# EAGLE board xBeeMSP (EAGLE 9.2.2)
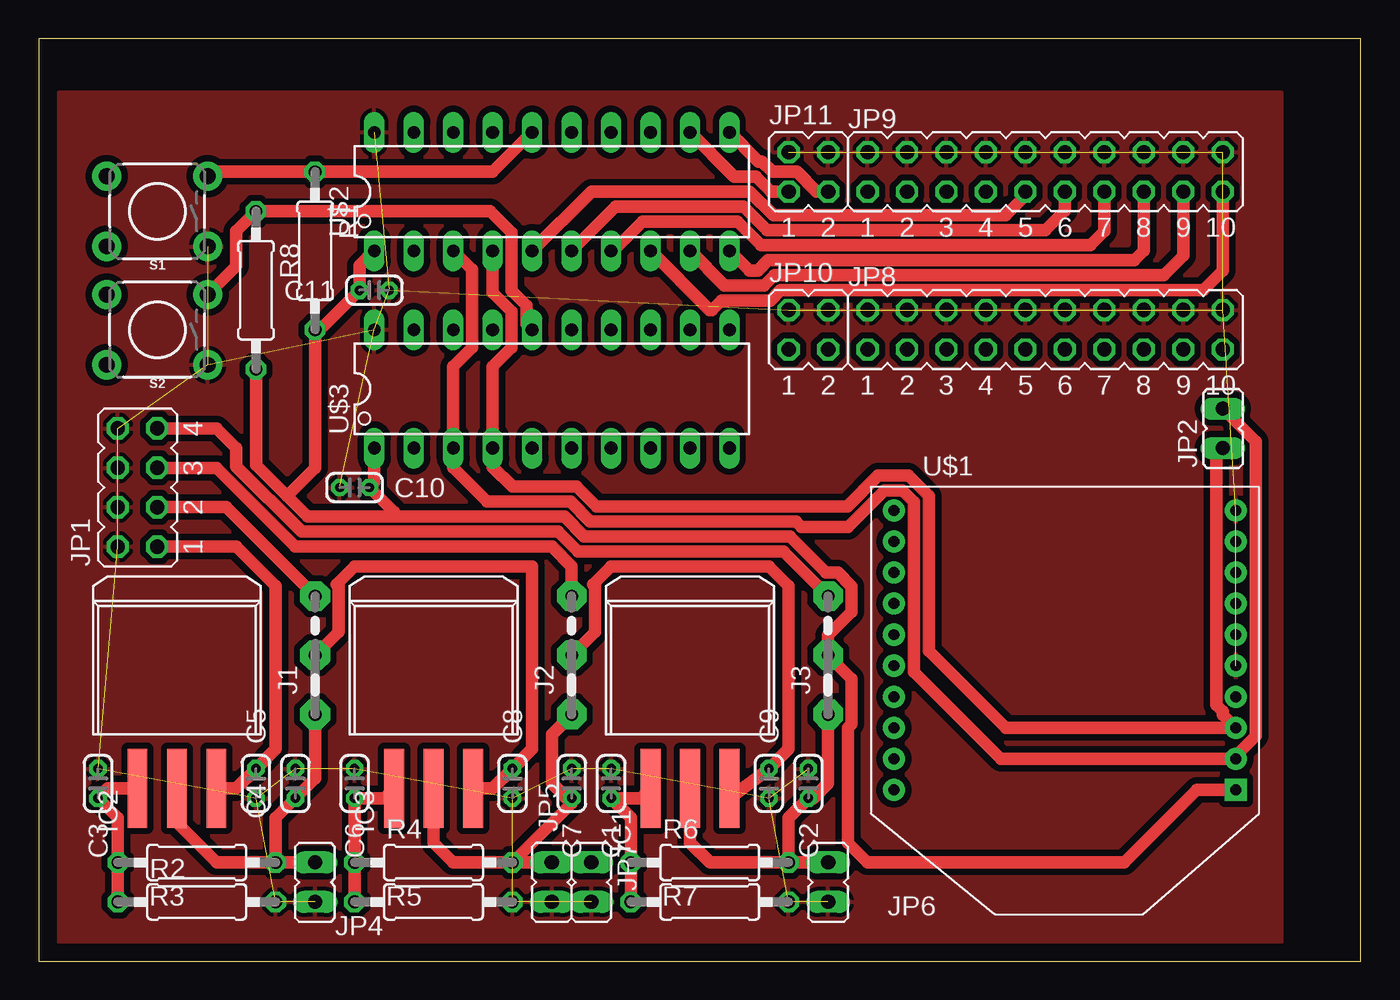
[diagram p0: board, top side]
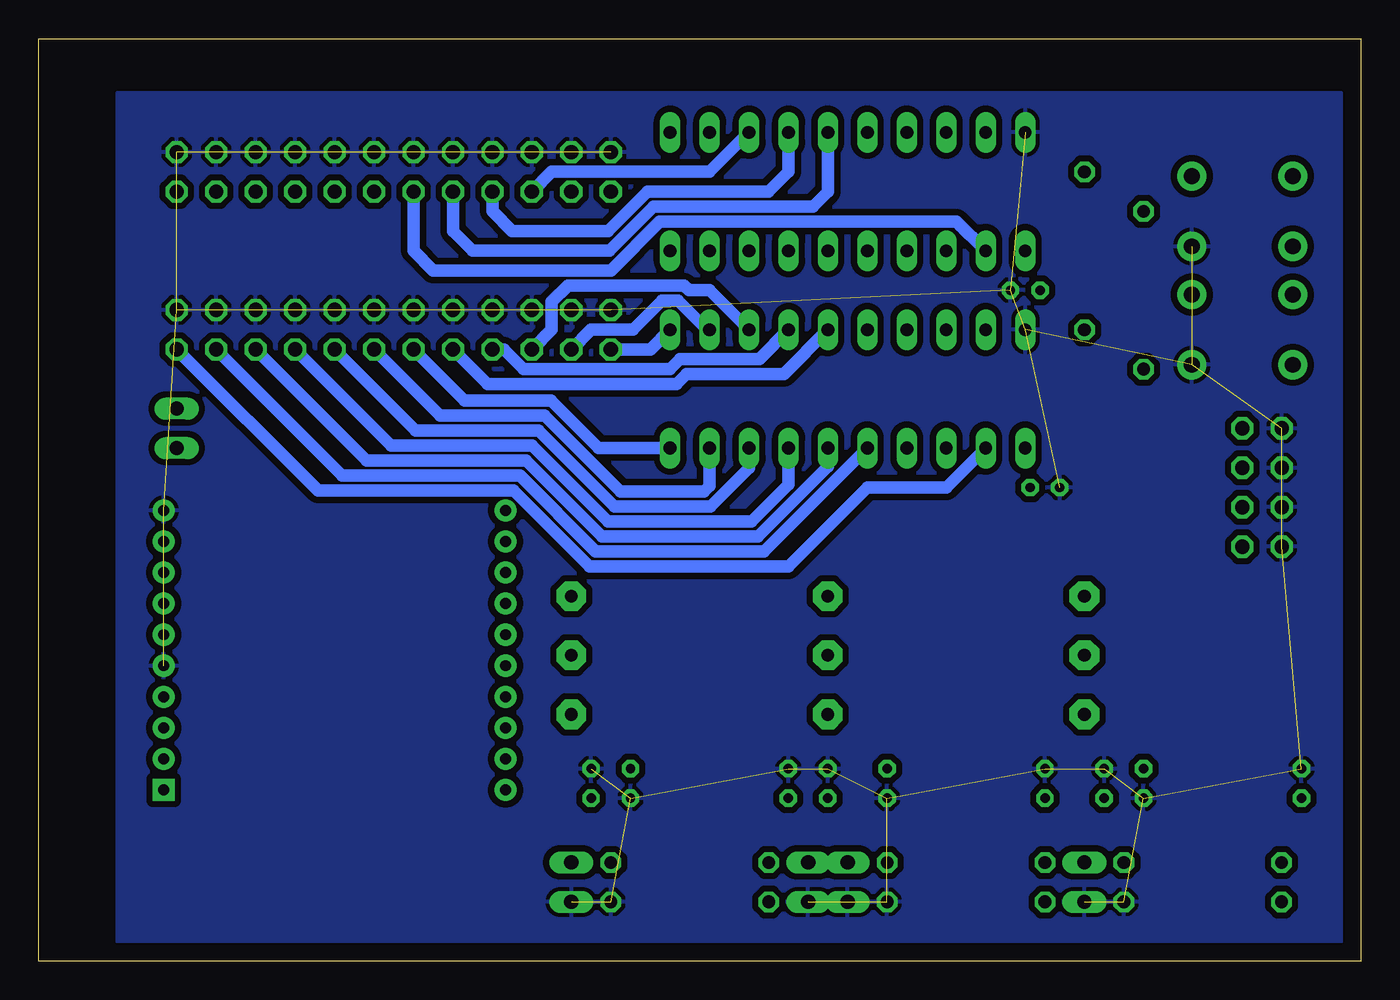
[diagram p1: board, bottom side, seen from below]

Size 85.07 x 59.36 mm. Coordinates in mm from the lower left corner, seen from the top.
Outline: 0,0 85.07,0 85.07,59.36 0,59.36 0,0
Copper layers (1*16): Top 0.035mm / dielectric 1.5mm / Bottom 0.035mm
Design rules "default": minimum track width 6mil, minimum drill 0.35mm, track to track 6mil, track to pad 6mil, pad to pad 6mil, via to via 6mil, smd to smd 6mil, copper to edge 40mil, drill to drill 6mil, minimum pad ring 10mil, minimum via ring 8mil, stop-mask expansion 4mil, vias tented up to drill 0mil, thermal gap 10mil

## Footprints (pad centres in the part's own frame; a part is rotated, then mirrored left to right if it is on the bottom)
C020-035X018 = drill 0.61 pad 1.016 octagon: 1 -0.953,0; 2 0.953,0
DD-3 = smd 1.27 x 5.08: 1 -2.54,-7.938; 2 0,-7.938; 3 2.54,-7.938
04C = drill 0.813 pad 1.905 octagon: 1 -1.905,0; 2 1.905,0; 3 5.715,0
JP4Q = drill 0.914 octagon: 1 -3.81,-1.27; 2 -3.81,1.27; 3 -1.27,-1.27; 4 -1.27,1.27; 5 1.27,-1.27; 6 1.27,1.27; 7 3.81,-1.27; 8 3.81,1.27
JP1 = drill 0.914 long: 1 0,-1.27; 2 0,1.27
JP10Q = drill 0.914 octagon: 1 -11.43,-1.27; 2 -11.43,1.27; 3 -8.89,-1.27; 4 -8.89,1.27; 5 -6.35,-1.27; 6 -6.35,1.27; 7 -3.81,-1.27; 8 -3.81,1.27; 9 -1.27,-1.27; 10 -1.27,1.27; 11 1.27,-1.27; 12 1.27,1.27; 13 3.81,-1.27; 14 3.81,1.27; 15 6.35,-1.27; 16 6.35,1.27; 17 8.89,-1.27; 18 8.89,1.27; 19 11.43,-1.27; 20 11.43,1.27
JP2Q = drill 0.914 octagon: 1 -1.27,-1.27; 2 -1.27,1.27; 3 1.27,-1.27; 4 1.27,1.27
0207/10 = drill 0.813 octagon: 1 -5.08,0; 2 5.08,0
TACTILE_SWITCH_PTH_6.0MM_KIT = drill 1.016 pad 1.88: 1 -3.251,2.261; 2 3.251,2.261; 3 -3.251,-2.261; 4 3.251,-2.261
XBEE = drill 0.7 pad 1.422 square: 1 -11,5.5 | drill 0.7 pad 1.422: 2 -11,3.5; 3 -11,1.5; 4 -11,-0.5; 5 -11,-2.5; 6 -11,-4.5; 7 -11,-6.5; 8 -11,-8.5; 9 -11,-10.5; 10 -11,-12.5; 11 11,-12.5; 12 11,-10.5; 13 11,-8.5; 14 11,-6.5; 15 11,-4.5; 16 11,-2.5; 17 11,-0.5; 18 11,1.5; 19 11,3.5; 20 11,5.5
N20 = drill 0.813 long: 1 -11.435,-3.81; 2 -8.895,-3.81; 3 -6.355,-3.81; 4 -3.815,-3.81; 5 -1.275,-3.81; 6 1.265,-3.81; 7 3.805,-3.81; 8 6.345,-3.81; 9 8.885,-3.81; 10 11.425,-3.81; 11 11.425,3.81; 12 8.885,3.81; 13 6.345,3.81; 14 3.805,3.81; 15 1.265,3.81; 16 -1.275,3.81; 17 -3.815,3.81; 18 -6.355,3.81; 19 -8.895,3.81; 20 -11.435,3.81

## Placement (x,y rotation side)
C1  10u  [C020-035X018]  36.83,11.43 270 top
C2  10u  [C020-035X018]  49.53,11.43 270 top
C3  10u  [C020-035X018]  3.81,11.43 270 top
C4  10u  [C020-035X018]  16.51,11.43 270 top
C5  10u  [C020-035X018]  13.97,11.43 90 top
C6  10u  [C020-035X018]  20.32,11.43 270 top
C7  10u  [C020-035X018]  34.29,11.43 270 top
C8  10u  [C020-035X018]  30.48,11.43 90 top
C9  10u  [C020-035X018]  46.99,11.43 90 top
C10  10u  [C020-035X018]  20.32,30.48 0 top
C11  10u  [C020-035X018]  21.59,43.18 180 top
IC1  REG1117F  [DD-3]  41.91,19.05 0 top
IC2  REG1117F  [DD-3]  8.89,19.05 0 top
IC3  REG1117F  [DD-3]  25.4,19.05 0 top
J1  [04C]  17.78,17.78 90 top
J2  [04C]  34.29,17.78 90 top
J3  [04C]  50.8,17.78 90 top
JP1  [JP4Q]  6.35,30.48 90 top
JP2  [JP1]  76.2,34.29 0 top
JP4  [JP1]  17.78,5.08 180 top
JP5  [JP1]  33.02,5.08 180 top
JP6  [JP1]  50.8,5.08 180 top
JP7  [JP1]  35.56,5.08 180 top
JP8  [JP10Q]  64.77,40.64 0 top
JP9  [JP10Q]  64.77,50.8 0 top
JP10  [JP2Q]  49.53,40.64 0 top
JP11  [JP2Q]  49.53,50.8 0 top
R1  47K  [0207/10]  17.78,45.72 270 top
R2  12  [0207/10]  10.16,6.35 0 top
R3  12  [0207/10]  10.16,3.81 180 top
R4  113  [0207/10]  25.4,6.35 0 top
R5  340  [0207/10]  25.4,3.81 180 top
R6  115  [0207/10]  43.18,6.35 0 top
R7  187  [0207/10]  43.18,3.81 180 top
R8  47K  [0207/10]  13.97,43.18 270 top
S1  MOMENTARY-SWITCH-SPST-PTH-6.0MM-KIT  [TACTILE_SWITCH_PTH_6.0MM_KIT]  7.62,48.26 180 top
S2  MOMENTARY-SWITCH-SPST-PTH-6.0MM-KIT  [TACTILE_SWITCH_PTH_6.0MM_KIT]  7.62,40.64 180 top
U$1  XBEE  [XBEE]  66.04,16.51 180 top
U$2  G2X[1/5]2---N20  [N20]  33.02,49.53 0 top
U$3  G2X[1/5]2---N20  [N20]  33.02,36.83 0 top

## Library data of the parts
C1-C11 = cap-master
IC1-IC3 = burr-brown; MF: TEXAS INSTRUMENTS; MPN: REG1117FAKTTT; OC_FARNELL: 1296120; OC_NEWARK: 87H2562
J1-J3 JP1 JP2 JP4-JP11 = jumper
R1-R8 = resistor
S1 S2 = SparkFun-Switches; PROD_ID: SWCH-08441; SF_SKU: COM-00097
U$1 = adafruit
U$2 U$3 = TI_MSP430_v16

## Nets
3.3VOUT: C2.2 IC1.2 J3.1 JP6.1 R6.2
5VIN: C9.2 IC1.3 J2.2
5VOUT: C7.2 IC3.2 J2.1 JP5.1 JP7.1 R4.2
12VIN: C8.2 IC3.3 J1.2
12VOUT: C4.2 IC2.2 J1.1 JP4.1 R2.2
BACKUP-5VIN: J2.3 JP1.5
BACKUP-12VIN: J1.3 JP1.3
BACKUP-VCC: J3.3 JP1.7
GND: C1.1 C2.1 C3.1 C4.1 C5.1 C6.1 C7.1 C8.1 C9.1 C10.1 C11.1 JP1.2 JP1.4 JP1.6 JP1.8 JP4.2 JP5.2 JP6.2 JP7.2 JP8.2 JP8.4 JP8.6 JP8.8 JP8.10 JP8.12 JP8.14 JP8.16 JP8.18 JP8.20 JP9.2 JP9.4 JP9.6 JP9.8 JP9.10 JP9.12 JP9.14 JP9.16 JP9.18 JP9.20 JP10.2 JP10.4 JP11.2 JP11.4 R3.1 R5.1 R7.1 S1.1 S2.1 U$1.5 U$1.10 U$2.20 U$3.20
N$1: JP2.2 U$1.2 U$2.3 U$3.3
N$2: JP2.1 U$1.3 U$2.4 U$3.4
N$3: JP9.7 U$2.2
N$4: R1.1 S1.3 U$2.16
N$5: JP8.19 U$3.2
N$6: JP9.15 U$2.10
N$7: JP9.5 U$2.15
N$8: JP9.17 U$2.9
N$9: JP8.17 U$3.5
N$10: JP9.19 U$2.8
N$11: JP9.3 U$2.14
N$12: JP8.15 U$3.6
N$13: JP9.1 U$2.13
N$14: JP11.1 U$2.12
N$15: R8.1 S2.3 U$3.16
N$16: JP11.3 U$2.11
N$17: JP9.13 U$2.7
N$18: JP9.11 U$2.6
N$19: C3.2 IC2.1 R2.1 R3.2
N$20: JP9.9 U$2.5
N$21: C1.2 IC1.1 R6.1 R7.2
N$22: JP8.13 U$3.7
N$23: C6.2 IC3.1 R4.1 R5.2
N$24: JP8.11 U$3.8
N$25: JP8.9 U$3.9
N$26: JP8.7 U$3.10
N$27: JP10.3 U$3.12
N$28: JP8.3 U$3.14
N$30: JP10.1 U$3.11
N$31: JP8.5 U$3.15
N$32: JP8.1 U$3.13
N$38: C5.2 IC2.3 JP1.1
VCC: C10.2 C11.2 J3.2 R1.2 R8.2 U$1.1 U$2.1 U$3.1

## Tracks (layer width: path | path; a pad name or v marks a point on that pad's centre or on a via)
3.3VOUT
  Top 0.813: IC1.2 41.91,7.62 43.18,6.35 R6.2 | R6.2 48.26,9.21 C2.2 49.85,10.48 50.8,11.43 J3.1 | JP6.1 R6.2
5VIN
  Top 0.813: IC1.3 44.45,10.48 C9.2 48.26,13.65 48.26,24.13 46.99,25.4 36.83,25.4 35.68,24.25 35.8,24.12 35.8,21.2 J2.2
5VOUT
  Top 0.813: IC3.2 25.4,7.62 26.67,6.35 R4.2 | R4.2 34.29,10.16 C7.2 33.97,10.48 33.02,11.43 33.02,14.61 J2.1 | R4.2 31.75,6.35 JP5.1 JP7.1
12VIN
  Top 0.813: IC3.3 29.21,11.11 C8.2 31.75,13.65 31.75,25.4 20.32,25.4 19.17,24.25 19.29,24.12 19.29,21.2 J1.2
12VOUT
  Top 0.813: IC2.2 8.89,8.89 11.43,6.35 R2.2 | R2.2 15.24,9.21 C4.2 17.78,11.75 J1.1 | JP4.1 R2.2
BACKUP-5VIN
  Top 0.813: J2.3 34.29,25.4 33.02,26.67 16.51,26.67 11.43,31.75 JP1.5
BACKUP-12VIN
  Top 0.813: J1.3 12.06,29.21 JP1.3
BACKUP-VCC
  Top 0.813: J3.3 47.93,26.36 34.69,26.36 33.42,27.64 16.91,27.64 12.7,31.85 12.7,33.02 11.43,34.29 JP1.7
GND  (51 unrouted)
  pour Bottom (isolate 0.406): 1.27,55.88 1.27,1.27 80.01,1.27 80.01,55.88
  pour Top (isolate 0.406): 1.27,55.88 1.27,1.27 80.01,1.27 80.01,55.88
N$1
  Top 0.813: U$3.3 | U$3.3 26.66,31.75 28.85,29.57 34.22,29.57 35.49,28.3 48.73,28.3 49.08,27.94 52.07,27.94 54.41,30.28 55.57,30.28 56.31,29.54 56.31,18.62 61.92,13.01 U$1.2 77.04,13.21 78.31,14.48 78.31,33.45 JP2.2 | U$3.3 26.67,38.26 27.88,39.48 27.88,44.5 U$2.3
N$2
  Top 0.813: JP2.1 75.77,32.59 75.77,16.48 76.2,16.05 76.2,15.85 U$1.3 62.23,15.01 57.28,19.96 57.28,29.94 55.97,31.25 54.01,31.25 52.03,29.26 35.89,29.26 34.62,30.53 30.48,30.53 29.2,31.81 U$3.4 29.2,38.26 30.42,39.48 30.42,41.8 29.2,43.03 U$2.4
N$3
  Bottom 0.813: U$2.2 26,47.6 45.11,47.6 48.26,44.45 59.69,44.45 60.96,45.72 JP9.7
N$4
  Top 0.813: S1.3 11.15,50.8 R1.1 29.2,50.8 U$2.16
N$5
  Bottom 0.813: U$3.2 26.66,30.48 31.75,30.48 36.83,25.4 49.63,25.4 54.51,30.28 67.11,30.28 JP8.19
N$6
  Top 0.813: U$2.10 45.72,44.45 46.27,44.45 46.93,45.11 70.51,45.11 71.12,45.72 JP9.15
N$7
  Bottom 0.813: U$2.15 34.28,49.54 35.25,48.57 45.51,48.57 48.36,45.72 57.15,45.72 58.42,46.99 JP9.5
N$8
  Top 0.813: U$2.9 44.14,43.48 46.67,43.48 47.33,44.15 72.39,44.15 73.66,45.41 JP9.17
N$9
  Bottom 0.813: U$3.5 38.4,26.36 49.23,26.36 54.11,31.25 65.53,31.25 JP8.17
N$10
  Top 0.813: U$2.8 43.17,41.91 43.33,41.91 43.94,42.52 47.07,42.52 47.73,43.18 74.93,43.18 76.2,44.45 JP9.19
N$11
  Bottom 0.813: U$2.14 36.83,50.8 38.1,49.53 45.91,49.53 48.45,46.99 54.61,46.99 55.88,48.26 JP9.3
N$12
  Bottom 0.813: U$3.6 34.29,31.84 38.8,27.33 48.83,27.33 53.71,32.21 63.96,32.21 JP8.15
N$13
  Bottom 0.813: U$2.13 41.91,50.8 52.07,50.8 JP9.1
N$14
  Top 0.813: U$2.12 44.75,50.5 46.15,50.5 47.11,49.53 JP11.1
N$15
  Top 0.813: S2.3 12.7,44.73 12.7,46.99 R8.1 29.05,48.26 30.42,46.89 30.42,43.17 31.39,42.21 31.39,41 U$3.16
N$16
  Top 0.813: U$2.11 46.33,51.46 46.55,51.46 47.21,50.8 48.79,50.8 50.06,49.53 JP11.3
N$17
  Top 0.813: U$2.7 36.98,45.72 38.86,47.6 44.95,47.6 46.47,46.08 67.67,46.08 68.58,46.99 JP9.13
N$18
  Top 0.813: U$2.6 37.13,48.57 45.35,48.57 46.87,47.04 64.77,47.04 66.04,48.31 JP9.11
N$19
  Top 0.152: 6.03,11.11 IC2.1
  Top 0.813: R3.2 R2.1 5.08,9.21 C3.2 4.44,11.11 IC2.1
N$20
  Top 0.813: U$2.5 35.55,49.53 45.75,49.53 47.27,48.01 62.23,48.01 63.5,49.28 JP9.9
N$21
  Top 0.813: IC1.1 38.73,10.48 C1.2 38.1,9.21 R6.1 R7.2
N$22
  Bottom 0.813: U$3.7 36.83,30.66 39.2,28.3 48.44,28.3 53.31,33.18 62.39,33.18 JP8.13
N$23
  Top 0.813: R5.2 R4.1 C6.2 22.23,10.48 IC3.1
N$24
  Bottom 0.813: U$3.8 39.36,31.75 41.85,29.26 48.03,29.26 52.92,34.14 60.81,34.14 JP8.11
N$25
  Bottom 0.813: U$3.9 41.91,30.57 42.25,30.23 47.64,30.23 52.52,35.11 59.24,35.11 JP8.9
N$26
  Bottom 0.813: U$3.10 49.06,33.02 52.11,36.07 57.15,36.07 57.66,36.07 JP8.7
N$27
  Bottom 0.813: JP10.3 49.53,40.64 46.83,40.64 44.95,42.52 43.94,42.52 42.06,40.64 U$3.12
N$28
  Bottom 0.813: JP8.3 55.14,39.37 53.87,38.1 44.45,38.1 | 44.45,38.1 | U$3.14 38.7,38.76 43.79,38.76 44.45,38.1
N$30
  Bottom 0.813: U$3.11 45.72,39.37 JP10.1
N$31
  Bottom 0.813: JP8.5 56.19,37.14 44.05,37.14 43.38,37.8 37.13,37.8 U$3.15
N$32
  Bottom 0.813: U$3.13 41.91,43.18 43.23,43.18 43.54,43.48 51.02,43.48 52.07,42.44 52.07,40.64 JP8.1
N$38
  Top 0.813: IC2.3 12.7,11.11 C5.2 15.24,13.65 15.24,24.13 12.7,26.67 JP1.1
VCC
  Top 0.813: U$1.1 74.51,11.01 69.85,6.35 53.34,6.35 52.07,7.62 52.07,15.01 52.31,15.25 52.31,18.17 J3.2 50.8,20.95 52.31,22.47 52.31,24.12 51.43,25.01 50.65,25.01 48.33,27.33 35.09,27.33 33.82,28.6 25.4,28.6 22.86,28.6 | R8.2 13.97,31.94 15.97,29.94 | 15.97,29.94 17.31,28.6 22.86,28.6 | 15.97,29.94 17.78,31.75 R1.2 18.1,40.64 C11.2 20.64,44.77 U$2.1 | U$3.1 21.59,30.79 C10.2 22.86,28.89 22.86,28.6